# Altium PCB AD835乘法器 腐蚀电路图.PcbDoc
Units mil, origin at the board's own origin, x right, y up, seen from the top; angles counter-clockwise.
Board outline 9097 x 5458 mil, 2 copper layers (Top Layer, Bottom Layer); 108 components, 10 nets, 288 pads, 0 vias.
Unrouted connection lines stored in the file: 19.
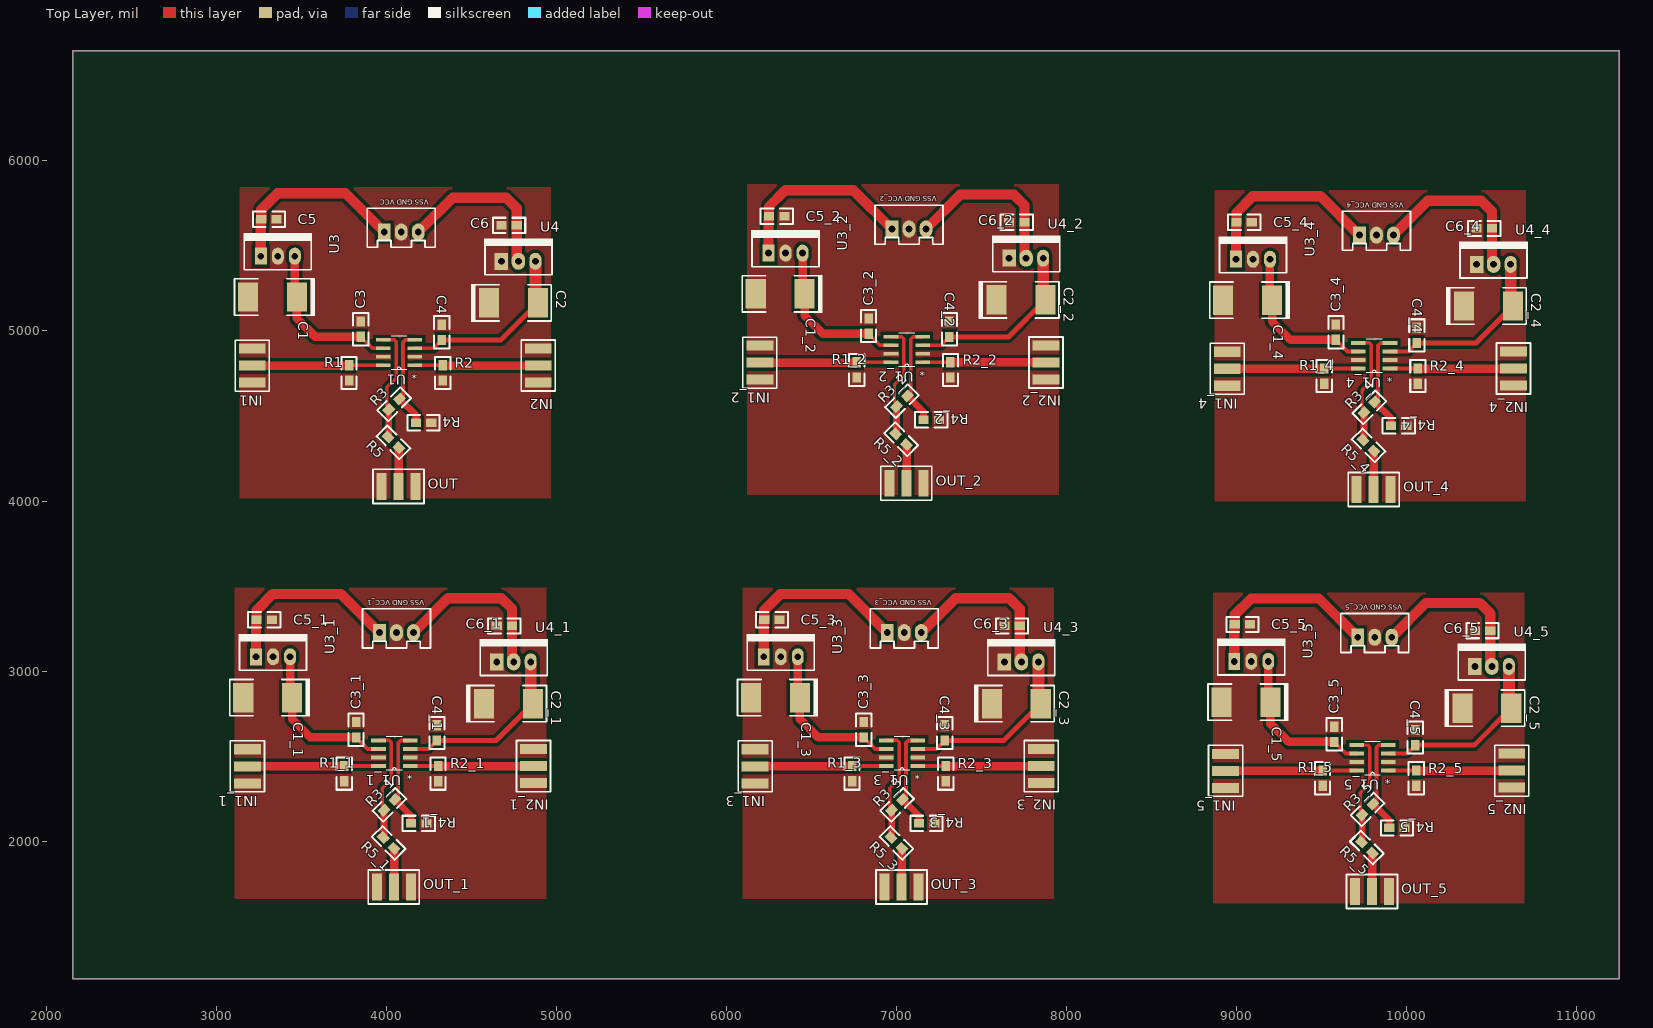
[diagram p0: Top Layer view]
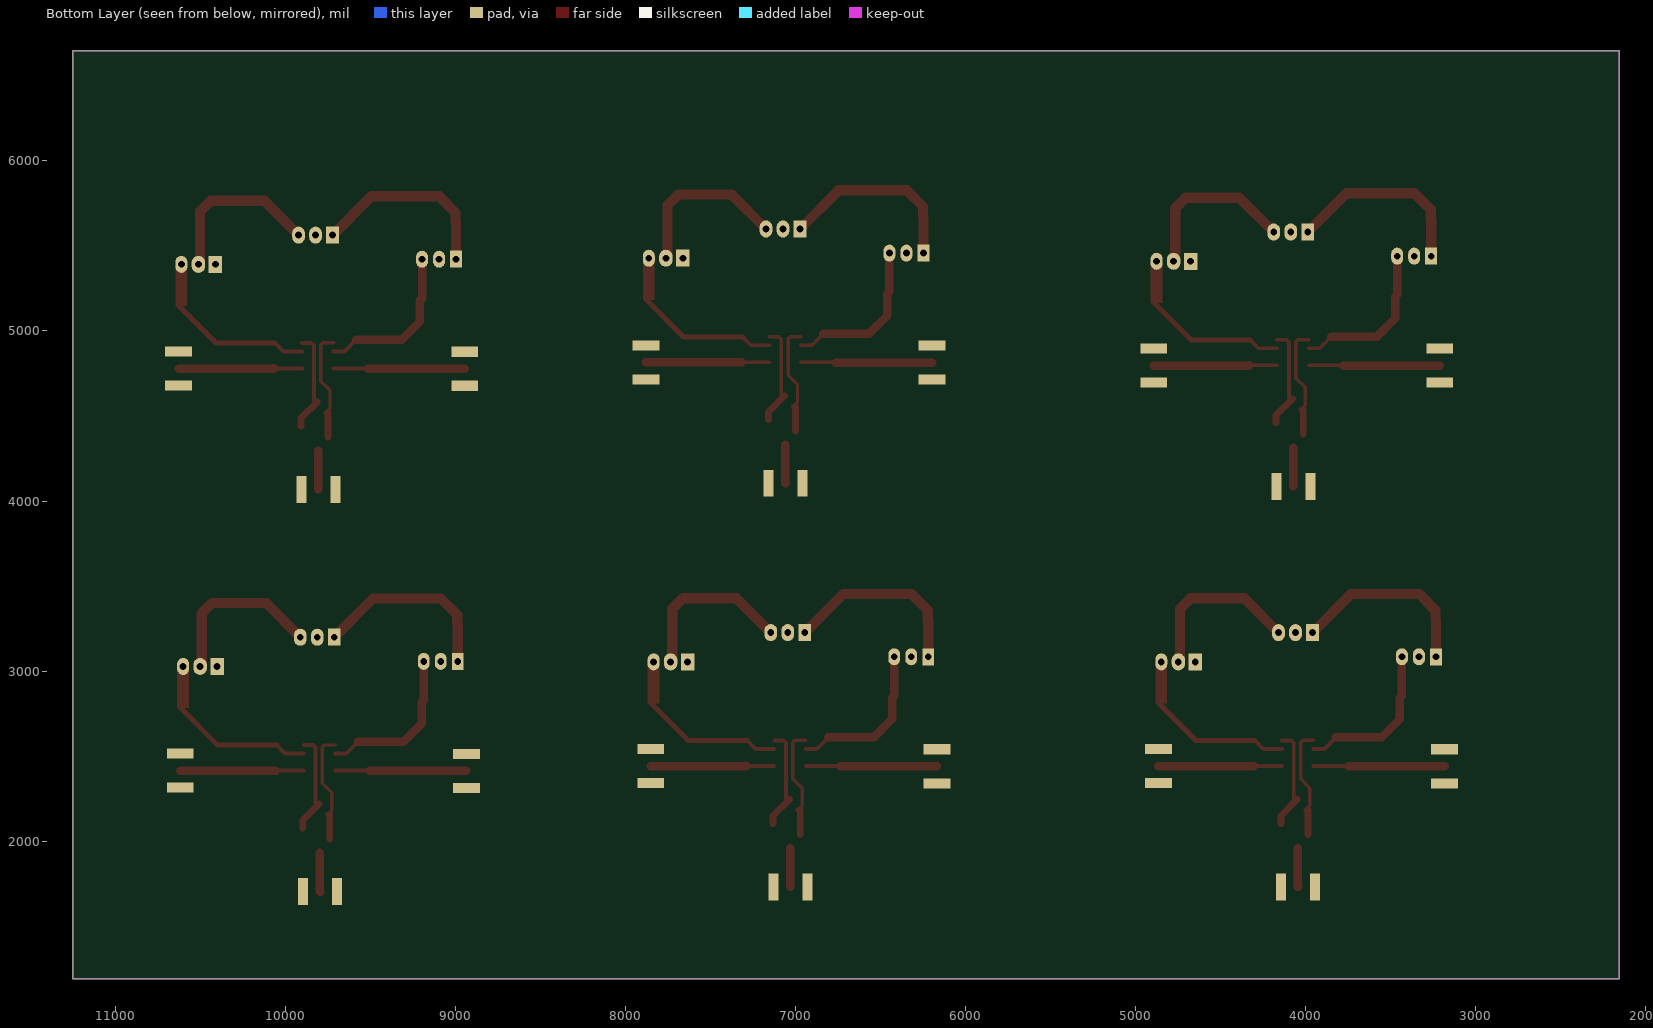
[diagram p1: Bottom Layer view, seen from below]

## Layer stack, top to bottom
Top Solder: solder mask 0.4, Solder Resist, Dk 3.5
Top Layer: signal copper 1.4
Dielectric 1: dielectric 12.6, FR-4, Dk 4.8
Bottom Layer: signal copper 1.4
Bottom Solder: solder mask 0.4, Solder Resist, Dk 3.5

## Board outline
2155,1191 2155,6649 11252,6649 11252,1191

## Design rules (kind name [scope] priority, off if disabled: settings)
Clearance [All] p1: gap=10 except(20: Arc-Fill Arc-Poly Track-Fill Track-Poly SMDPad-Fill SMDPad-Poly THPad-Fill THPad-Poly Via-Fill Via-Poly Fill-Fill Fill-Poly Poly-Poly)
PlaneClearance [All] p1: clearance=40
PolygonConnect [All] p1: connectstyle=Direct reliefconductorwidth=10 reliefentries=4 polygonreliefangle="90 Angle" airgapwidth=10
RoutingVias [All] p1: holewidth=28 width=50 viastyle="Through Hole" minholewidth=28 minwidth=50 maxholewidth=28 maxwidth=50
SolderMaskExpansion [All] p1: expansion=4
Width [All] p1: maxlimit=60 minlimit=6 preferedwidth=10
29 further rules are at their usual default settings.

## Classes and differential pairs
component class AD835乘法器: C1 C2 C3 C4 C5 C6 IN1 IN2 OUT R1 R2 R3 R4 R5 U1 U3 U4 "VSS GND VCC"

## Components (designator, comment, footprint, x,y, rotation, side; value= is the part's Value field where it differs from the comment)
C1 "4.7uf" 7343C-TYPE_D 3474,5200 r0 top
C1_1 "4.7uf" 7343C-TYPE_D 3446,2844 r0 top (schematic designator C1)
C1_2 "4.7uf" 7343C-TYPE_D 6460,5218 r0 top (schematic designator C1)
C1_3 "4.7uf" 7343C-TYPE_D 6432,2844 r0 top (schematic designator C1)
C1_4 "4.7uf" 7343C-TYPE_D 9209,5182 r0 top (schematic designator C1)
C1_5 "4.7uf" 7343C-TYPE_D 9199,2817 r0 top (schematic designator C1)
C2 "4.7uf" 7343C-TYPE_D 4603.6,5165 r180 top
C2_1 "4.7uf" 7343C-TYPE_D 4575.6,2809 r180 top (schematic designator C2)
C2_2 "4.7uf" 7343C-TYPE_D 7589.6,5183 r180 top (schematic designator C2)
C2_3 "4.7uf" 7343C-TYPE_D 7561.6,2809 r180 top (schematic designator C2)
C2_4 "4.7uf" 7343C-TYPE_D 10338.6,5147 r180 top (schematic designator C2)
C2_5 "4.7uf" 7343C-TYPE_D 10328.6,2782 r180 top (schematic designator C2)
C3 "0.01uF" 0805 3850,5056 r270 top
C3_1 "0.01uF" 0805 3822,2700 r270 top (schematic designator C3)
C3_2 "0.01uF" 0805 6836,5074 r270 top (schematic designator C3)
C3_3 "0.01uF" 0805 6808,2700 r270 top (schematic designator C3)
C3_4 "0.01uF" 0805 9585,5038 r270 top (schematic designator C3)
C3_5 "0.01uF" 0805 9575,2673 r270 top (schematic designator C3)
C4 "Cap1" 0805 4326,5037 r270 top
C4_1 "Cap1" 0805 4298,2681 r270 top (schematic designator C4)
C4_2 "Cap1" 0805 7312,5055 r270 top (schematic designator C4)
C4_3 "Cap1" 0805 7284,2681 r270 top (schematic designator C4)
C4_4 "Cap1" 0805 10061,5019 r270 top (schematic designator C4)
C4_5 "Cap1" 0805 10051,2654 r270 top (schematic designator C4)
C5 "Cap1" 0805 3355,5657 r180 top
C5_1 "Cap1" 0805 3327,3301 r180 top (schematic designator C5)
C5_2 "Cap1" 0805 6341,5675 r180 top (schematic designator C5)
C5_3 "Cap1" 0805 6313,3301 r180 top (schematic designator C5)
C5_4 "Cap1" 0805 9090,5639 r180 top (schematic designator C5)
C5_5 "Cap1" 0805 9080,3274 r180 top (schematic designator C5)
C6 "Cap1" 0805 4677,5621 r0 top
C6_1 "Cap1" 0805 4649,3265 r0 top (schematic designator C6)
C6_2 "Cap1" 0805 7663,5639 r0 top (schematic designator C6)
C6_3 "Cap1" 0805 7635,3265 r0 top (schematic designator C6)
C6_4 "Cap1" 0805 10412,5603 r0 top (schematic designator C6)
C6_5 "Cap1" 0805 10402,3238 r0 top (schematic designator C6)
IN1 "SMA-2" SMA-2 3211,4796 r270 top
IN1_1 "SMA-2" SMA-2 3183,2440 r270 top (schematic designator IN1)
IN1_2 "SMA-2" SMA-2 6197,4814 r270 top (schematic designator IN1)
IN1_3 "SMA-2" SMA-2 6169,2440 r270 top (schematic designator IN1)
IN1_4 "SMA-2" SMA-2 8946,4778 r270 top (schematic designator IN1)
IN1_5 "SMA-2" SMA-2 8936,2413 r270 top (schematic designator IN1)
IN2 "SMA-2" SMA-2 4894,4797 r90 top
IN2_1 "SMA-2" SMA-2 4866,2441 r90 top (schematic designator IN2)
IN2_2 "SMA-2" SMA-2 7880,4815 r90 top (schematic designator IN2)
IN2_3 "SMA-2" SMA-2 7852,2441 r90 top (schematic designator IN2)
IN2_4 "SMA-2" SMA-2 10629,4779 r90 top (schematic designator IN2)
IN2_5 "SMA-2" SMA-2 10619,2414 r90 top (schematic designator IN2)
OUT "SMA-2" SMA-2 4072,4086 r0 top
OUT_1 "SMA-2" SMA-2 4044,1730 r0 top (schematic designator OUT)
OUT_2 "SMA-2" SMA-2 7058,4104 r0 top (schematic designator OUT)
OUT_3 "SMA-2" SMA-2 7030,1730 r0 top (schematic designator OUT)
OUT_4 "SMA-2" SMA-2 9807,4068 r0 top (schematic designator OUT)
OUT_5 "SMA-2" SMA-2 9797,1703 r0 top (schematic designator OUT)
R1 "RES" 0805 3781,4798 r270 top
R1_1 "RES" 0805 3753,2442 r270 top (schematic designator R1)
R1_2 "RES" 0805 6767,4816 r270 top (schematic designator R1)
R1_3 "RES" 0805 6739,2442 r270 top (schematic designator R1)
R1_4 "RES" 0805 9516,4780 r270 top (schematic designator R1)
R1_5 "RES" 0805 9506,2415 r270 top (schematic designator R1)
R2 "RES" 0805 4332,4708 r90 top
R2_1 "RES" 0805 4304,2352 r90 top (schematic designator R2)
R2_2 "RES" 0805 7318,4726 r90 top (schematic designator R2)
R2_3 "RES" 0805 7290,2352 r90 top (schematic designator R2)
R2_4 "RES" 0805 10067,4690 r90 top (schematic designator R2)
R2_5 "RES" 0805 10057,2325 r90 top (schematic designator R2)
R3 "RES" 0805 4078,4601 r225 top
R3_1 "RES" 0805 4050,2245 r225 top (schematic designator R3)
R3_2 "RES" 0805 7064,4619 r225 top (schematic designator R3)
R3_3 "RES" 0805 7036,2245 r225 top (schematic designator R3)
R3_4 "RES" 0805 9813,4583 r225 top (schematic designator R3)
R3_5 "RES" 0805 9803,2218 r225 top (schematic designator R3)
R4 "RES" 0805 4264,4460 r180 top
R4_1 "RES" 0805 4236,2104 r180 top (schematic designator R4)
R4_2 "RES" 0805 7250,4478 r180 top (schematic designator R4)
R4_3 "RES" 0805 7222,2104 r180 top (schematic designator R4)
R4_4 "RES" 0805 9999,4442 r180 top (schematic designator R4)
R4_5 "RES" 0805 9989,2077 r180 top (schematic designator R4)
R5 "RES" 0805 4010,4377 r315 top
R5_1 "RES" 0805 3982,2021 r315 top (schematic designator R5)
R5_2 "RES" 0805 6996,4395 r315 top (schematic designator R5)
R5_3 "RES" 0805 6968,2021 r315 top (schematic designator R5)
R5_4 "RES" 0805 9745,4359 r315 top (schematic designator R5)
R5_5 "RES" 0805 9735,1994 r315 top (schematic designator R5)
U1 "AD835AR" R_8 4075,4873 r180 top
U1_1 "AD835AR" R_8 4047,2517 r180 top (schematic designator U1)
U1_2 "AD835AR" R_8 7061,4891 r180 top (schematic designator U1)
U1_3 "AD835AR" R_8 7033,2517 r180 top (schematic designator U1)
U1_4 "AD835AR" R_8 9810,4855 r180 top (schematic designator U1)
U1_5 "AD835AR" R_8 9800,2490 r180 top (schematic designator U1)
U3 "LM7805" TO-220#1 3262,5440 r0 top
U3_1 "LM7805" TO-220#1 3234,3084 r0 top (schematic designator U3)
U3_2 "LM7805" TO-220#1 6248,5458 r0 top (schematic designator U3)
U3_3 "LM7805" TO-220#1 6220,3084 r0 top (schematic designator U3)
U3_4 "LM7805" TO-220#1 8997,5422 r0 top (schematic designator U3)
U3_5 "LM7805" TO-220#1 8987,3057 r0 top (schematic designator U3)
U4 "LM7905" TO-220#2 4677,5410 r0 top
U4_1 "LM7905" TO-220#2 4649,3054 r0 top (schematic designator U4)
U4_2 "LM7905" TO-220#2 7663,5428 r0 top (schematic designator U4)
U4_3 "LM7905" TO-220#2 7635,3054 r0 top (schematic designator U4)
U4_4 "LM7905" TO-220#2 10412,5392 r0 top (schematic designator U4)
U4_5 "LM7905" TO-220#2 10402,3027 r0 top (schematic designator U4)
"VSS GND VCC" "XH2.54-3p" XH2.54-3p 3988,5582 r0 top (schematic designator U2)
"VSS GND VCC_1" "XH2.54-3p" XH2.54-3p 3960,3226 r0 top (schematic designator U2)
"VSS GND VCC_2" "XH2.54-3p" XH2.54-3p 6974,5600 r0 top (schematic designator U2)
"VSS GND VCC_3" "XH2.54-3p" XH2.54-3p 6946,3226 r0 top (schematic designator U2)
"VSS GND VCC_4" "XH2.54-3p" XH2.54-3p 9723,5564 r0 top (schematic designator U2)
"VSS GND VCC_5" "XH2.54-3p" XH2.54-3p 9713,3199 r0 top (schematic designator U2)

## Footprints (in the part's own frame and the unit in brackets; to place one, negate y for a bottom-side part, rotate by r counter-clockwise, add the part's x,y. Pads: shape width x height; smd on the part's side, far side on the other; paste and mask are expansions set on the pad)
0805 [mil]
  rect 60x50 smd: 1(0,0) 2(90,0)
  silkscreen extent -50,-45 140,45
7343C-TYPE_D [mm]
  rect 3x4.4 smd: 1(0,0) 2(-7.3,0)
  silkscreen extent -9.31,-2.84 2.7,2.84
R_8 [mil]
  rect 86x22 smd: 1(-93,75) 2(-93,25) 3(-93,-25) 4(-93,-75) 5(93,-75) 6(93,-25) 7(93,25) 8(93,75)
  silkscreen extent -46,-98 46,98, body extent -122,-99 122,99, height 69
SMA-2 [mm]
  rect 1.5x4 smd: 1(0,0)
  rect 1.5x4 all layers, no hole: 2(2.54,0) 3(-2.54,0)
  silkscreen extent -3.81,-2.54 3.81,2.54, body extent -3,-11.89 3,1.71, height 3.2
TO-220#1 [mil]
  rect 70x100 hole 40: 1(0,0)
  oval 70x100 hole 40: 2(100,0) 3(200,0)
  silkscreen extent -102,-80 302,135
TO-220#2 [mil]
  rect 80x100 hole 40: 1(0,0)
  oval 80x100 hole 40: 2(100,0)
  oval 70x100 hole 40: 3(200,0)
  silkscreen extent -102,-80 302,135
XH2.54-3p [mil]
  rect 75x100 hole 40: 1(0,0)
  oval 75x100 hole 40: 2(100,0) 3(200,0)
  silkscreen extent -100,-90 300,140

## Part data
C1 C1_1 C1_2 C1_3 C1_4 C1_5 C2 C2_1 C2_2 C2_3 C2_4 C2_5: library part Cap
C3 C3_1 C3_2 C3_3 C3_4 C3_5: library part Cap1
U1 U1_1 U1_2 U1_3 U1_4 U1_5: "Imported"

## Nets (pads, with @x,y where several pads share a name; then routed paths per layer and width w, separated by ;. In a path a pad name is that pad's centre, name@x,y a point inside that pad or via, vN(x,y) a via of type N, cw(c..) or ccw(c..) an arc to the next point about the centre after c; other vN are vias at no path point)
GND: "VSS GND VCC.2" C1.2 C2.1 C3.1 C4.1 C5.1 C6.1 IN1.2 IN1.3 IN2.2 IN2.3 OUT.2 OUT.3 R1.2 R2.1 R4.1 U1.2 U1.7 U3.2 U4.1
NetC1_1: C1.1 C3.2 U1.6 U3.3 | length 951.9
  Top Layer w22: C3.2 3918,4898 U1.6
  Top Layer w50: U3.3 3462,5212 C1.1 3474,5074 3582,4966 C3.2
NetC2_2: C2.2 C4.2 U1.3 U4.3 | length 833.6
  Top Layer w22: U1.3 4277,4898 C4.2
  Top Layer w30: C4.2 4673,4947 C2.2
NetC5_2: "VSS GND VCC.1" C5.2 U3.1 | length 1132.4
  Top Layer w60: U3.1 3262,5654 C5.2 3265,5714 3361,5810 3760,5810 3988,5582
NetC6_2: "VSS GND VCC.3" C6.2 U4.2 | length 1004.5
  Top Layer w60: 4188,5582 4390,5784 4705,5784 4767,5722 C6.2 4767,5420 U4.2
NetIN1_1: IN1.1 R1.1 U1.8 | length 771.8
  Top Layer w22: R1.1@3779,4796 R1.1 U1.8
  Top Layer w50: IN1.1 R1.1@3779,4796
NetIN2_1: IN2.1 R2.2 U1.1 | length 726.4
  Top Layer w22: U1.1 R2.2
  Top Layer w50: R2.2 4333,4797 IN2.1
NetOUT_1: OUT.1 R5.2 | length 228
  Top Layer w50: OUT.1 4073.64,4087.64 R5.2
NetR3_1: R3.1 R4.2 U1.4 | length 590.4
  Top Layer w22: R3.1@4090.64,4602.64 4098,4610 4098,4933 4113,4948 U1.4
  Top Layer w40: R3.1 4174,4505 R4.2
NetR3_2: R3.2 R5.1 U1.5 | length 663.5
  Top Layer w20: U1.5 4046,4948 4058,4936 4058,4723 4003,4668 4003,4563 R3.2@4027,4539
  Top Layer w30: R3.2@4019.86,4531.86 R3.2@4027,4539
  Top Layer w40: R5.1@4014.36,4394.64 R3.2
pads on no net: "VSS GND VCC_1.1" "VSS GND VCC_1.2" "VSS GND VCC_1.3" "VSS GND VCC_2.1" "VSS GND VCC_2.2" "VSS GND VCC_2.3" "VSS GND VCC_3.1" "VSS GND VCC_3.2" "VSS GND VCC_3.3" "VSS GND VCC_4.1" "VSS GND VCC_4.2" "VSS GND VCC_4.3" "VSS GND VCC_5.1" "VSS GND VCC_5.2" "VSS GND VCC_5.3" C1_1.1 C1_1.2 C1_2.1 C1_2.2 C1_3.1 C1_3.2 C1_4.1 C1_4.2 C1_5.1 C1_5.2 C2_1.1 C2_1.2 C2_2.1 C2_2.2 C2_3.1 C2_3.2 C2_4.1 C2_4.2 C2_5.1 C2_5.2 C3_1.1 C3_1.2 C3_2.1 C3_2.2 C3_3.1 C3_3.2 C3_4.1 C3_4.2 C3_5.1 C3_5.2 C4_1.1 C4_1.2 C4_2.1 C4_2.2 C4_3.1 C4_3.2 C4_4.1 C4_4.2 C4_5.1 C4_5.2 C5_1.1 C5_1.2 C5_2.1 C5_2.2 C5_3.1 C5_3.2 C5_4.1 C5_4.2 C5_5.1 C5_5.2 C6_1.1 C6_1.2 C6_2.1 C6_2.2 C6_3.1 C6_3.2 C6_4.1 C6_4.2 C6_5.1 C6_5.2 IN1_1.1 IN1_1.2 IN1_1.3 IN1_2.1 IN1_2.2 IN1_2.3 IN1_3.1 IN1_3.2 IN1_3.3 IN1_4.1 IN1_4.2 IN1_4.3 IN1_5.1 IN1_5.2 IN1_5.3 IN2_1.1 IN2_1.2 IN2_1.3 IN2_2.1 IN2_2.2 IN2_2.3 IN2_3.1 IN2_3.2 IN2_3.3 IN2_4.1 IN2_4.2 IN2_4.3 IN2_5.1 IN2_5.2 IN2_5.3 OUT_1.1 OUT_1.2 OUT_1.3 OUT_2.1 OUT_2.2 OUT_2.3 OUT_3.1 OUT_3.2 OUT_3.3 OUT_4.1 OUT_4.2 OUT_4.3 OUT_5.1 OUT_5.2 OUT_5.3 R1_1.1 R1_1.2 R1_2.1 R1_2.2 R1_3.1 R1_3.2 R1_4.1 R1_4.2 R1_5.1 R1_5.2 R2_1.1 R2_1.2 R2_2.1 R2_2.2 R2_3.1 R2_3.2 R2_4.1 R2_4.2 R2_5.1 R2_5.2 R3_1.1 R3_1.2 R3_2.1 R3_2.2 R3_3.1 R3_3.2 R3_4.1 R3_4.2 R3_5.1 R3_5.2 R4_1.1 R4_1.2 R4_2.1 R4_2.2 R4_3.1 R4_3.2 R4_4.1 R4_4.2 R4_5.1 R4_5.2 R5_1.1 R5_1.2 R5_2.1 R5_2.2 R5_3.1 R5_3.2 R5_4.1 R5_4.2 R5_5.1 R5_5.2 U1_1.1 U1_1.2 U1_1.3 U1_1.4 U1_1.5 U1_1.6 U1_1.7 U1_1.8 U1_2.1 U1_2.2 U1_2.3 U1_2.4 U1_2.5 U1_2.6 U1_2.7 U1_2.8 U1_3.1 U1_3.2 U1_3.3 U1_3.4 U1_3.5 U1_3.6 U1_3.7 U1_3.8 U1_4.1 U1_4.2 U1_4.3 U1_4.4 U1_4.5 U1_4.6 U1_4.7 U1_4.8 U1_5.1 U1_5.2 U1_5.3 U1_5.4 U1_5.5 U1_5.6 U1_5.7 U1_5.8 U3_1.1 U3_1.2 U3_1.3 U3_2.1 U3_2.2 U3_2.3 U3_3.1 U3_3.2 U3_3.3 U3_4.1 U3_4.2 U3_4.3 U3_5.1 U3_5.2 U3_5.3 U4_1.1 U4_1.2 U4_1.3 U4_2.1 U4_2.2 U4_2.3 U4_3.1 U4_3.2 U4_3.3 U4_4.1 U4_4.2 U4_4.3 U4_5.1 U4_5.2 U4_5.3
copper on no net: | length 34512.9
  Top Layer w20: 3954,2592 4018,2592 4030,2580 4030,2367 3975,2312 3975,2207 3999,2183 ; 6940,2592 7004,2592 7016,2580 7016,2367 6961,2312 6961,2207 6985,2183 ; 6968,4966 7032,4966 7044,4954 7044,4741 6989,4686 6989,4581 7013,4557 ; 9707,2565 9771,2565 9783,2553 9783,2340 9728,2285 9728,2180 9752,2156 ; 9717,4930 9781,4930 9793,4918 9793,4705 9738,4650 9738,4545 9762,4521
  Top Layer w22: 3751,2440 3753,2442 3954,2442 ; 3822,2610 3890,2542 3954,2542 ; 4062.64,2246.64 4070,2254 4070,2577 4085,2592 4140,2592 ; 4140,2442 4304,2442 ; 4140,2542 4249,2542 4298,2591 ; 6737,2440 6739,2442 6940,2442 ; 6765,4814 6767,4816 6968,4816 ; 6808,2610 6876,2542 6940,2542 ; 6836,4984 6904,4916 6968,4916 ; 7048.64,2246.64 7056,2254 7056,2577 7071,2592 7126,2592 ; 7076.64,4620.64 7084,4628 7084,4951 7099,4966 7154,4966 ; 7126,2442 7290,2442 ; 7126,2542 7235,2542 7284,2591 ; 7154,4816 7318,4816 ; 7154,4916 7263,4916 7312,4965 ; 9504,2413 9506,2415 9707,2415 ; 9514,4778 9516,4780 9717,4780 ; 9575,2583 9643,2515 9707,2515 ; 9585,4948 9653,4880 9717,4880 ; 9815.64,2219.64 9823,2227 9823,2550 9838,2565 9893,2565 ; 9825.64,4584.64 9833,4592 9833,4915 9848,4930 9903,4930 ; 9893,2415 10057,2415 ; 9893,2515 10002,2515 10051,2564 ; 9903,4780 10067,4780 ; 9903,4880 10012,4880 10061,4929
  Top Layer w30: 3991.86,2175.86 3999,2183 ; 4298,2591 4645,2591 4863,2809 ; 6977.86,2175.86 6985,2183 ; 7005.86,4549.86 7013,4557 ; 7284,2591 7631,2591 7849,2809 ; 7312,4965 7659,4965 7877,5183 ; 9744.86,2148.86 9752,2156 ; 9754.86,4513.86 9762,4521 ; 10051,2564 10398,2564 10616,2782 ; 10061,4929 10408,4929 10626,5147
  Top Layer w40: 3986.36,2038.64 3986.36,2181.36 ; 4050,2245 4146,2149 4146,2104 ; 6972.36,2038.64 6972.36,2181.36 ; 7000.36,4412.64 7000.36,4555.36 ; 7036,2245 7132,2149 7132,2104 ; 7064,4619 7160,4523 7160,4478 ; 9739.36,2011.64 9739.36,2154.36 ; 9749.36,4376.64 9749.36,4519.36 ; 9803,2218 9899,2122 9899,2077 ; 9813,4583 9909,4487 9909,4442
  Top Layer w50: 3183,2440 3751,2440 ; 3434,3084 3434,2856 3446,2844 3446,2718 3554,2610 3822,2610 ; 4044,1730 4045.64,1731.64 4045.64,1957.36 ; 4304,2442 4305,2441 4866,2441 ; 6169,2440 6737,2440 ; 6197,4814 6765,4814 ; 6420,3084 6420,2856 6432,2844 6432,2718 6540,2610 6808,2610 ; 6448,5458 6448,5230 6460,5218 6460,5092 6568,4984 6836,4984 ; 7030,1730 7031.64,1731.64 7031.64,1957.36 ; 7058,4104 7059.64,4105.64 7059.64,4331.36 ; 7290,2442 7291,2441 7852,2441 ; 7318,4816 7319,4815 7880,4815 ; 8936,2413 9504,2413 ; 8946,4778 9514,4778 ; 9187,3057 9187,2829 9199,2817 9199,2691 9307,2583 9575,2583 ; 9197,5422 9197,5194 9209,5182 9209,5056 9317,4948 9585,4948 ; 9797,1703 9798.64,1704.64 9798.64,1930.36 ; 9807,4068 9808.64,4069.64 9808.64,4295.36 ; 10057,2415 10058,2414 10619,2414 ; 10067,4780 10068,4779 10629,4779
  Top Layer w60: 3234,3084 3234,3298 3237,3301 3237,3358 3333,3454 3732,3454 3960,3226 ; 4160,3226 4362,3428 4677,3428 4739,3366 4739,3265 4739,3064 4749,3054 ; 6220,3084 6220,3298 6223,3301 6223,3358 6319,3454 6718,3454 6946,3226 ; 6248,5458 6248,5672 6251,5675 6251,5732 6347,5828 6746,5828 6974,5600 ; 7146,3226 7348,3428 7663,3428 7725,3366 7725,3265 7725,3064 7735,3054 ; 7174,5600 7376,5802 7691,5802 7753,5740 7753,5639 7753,5438 7763,5428 ; 8987,3057 8987,3271 8990,3274 8990,3331 9086,3427 9485,3427 9713,3199 ; 8997,5422 8997,5636 9000,5639 9000,5696 9096,5792 9495,5792 9723,5564 ; 9913,3199 10115,3401 10430,3401 10492,3339 10492,3238 10492,3037 10502,3027 ; 9923,5564 10125,5766 10440,5766 10502,5704 10502,5603 10502,5402 10512,5392

## Polygon pours and split planes (outlines as drawn)
no net on Top Layer "Top Layer-No Net" (solid, pour order 18): 8842,3487 8837,3482 8837,1609 10718,1609 10718,3487
no net on Top Layer "Top Layer-No Net" (solid, pour order 16): 8852,5852 8847,5847 8847,3974 10728,3974 10728,5852
no net on Top Layer "Top Layer-No Net" (solid, pour order 14): 6075,3514 6070,3509 6070,1636 7951,1636 7951,3514
no net on Top Layer "Top Layer-No Net" (solid, pour order 12): 6103,5888 6098,5883 6098,4010 7979,4010 7979,5888
no net on Top Layer "Top Layer-No Net" (solid, pour order 10): 3089,3514 3084,3509 3084,1636 4965,1636 4965,3514
GND on Top Layer "Top Layer-No Net" (solid, pour order 8): 3117,5870 3112,5865 3112,3992 4993,3992 4993,5870

## Keep-outs
Keep-Out Layer:
  the board outline again, w10

## Other copper
Top Layer:
  rectangle: 10568,2782 10637,3025
  rectangle: 10578,5147 10647,5390
  rectangle: 7801,2809 7870,3052
  rectangle: 7829,5183 7898,5426
  rectangle: 4815,2809 4884,3052
  rectangle net NetC2_2: 4843,5165 4912,5408

## Text inside footprints (layer, text, board x,y; h text height)
U1: Top Overlay "*" at 4183,4766 h50 r180; Mechanical 13 "*" at 4183,4766 h50 r180
U1_1: Top Overlay "*" at 4155,2410 h50 r180; Mechanical 13 "*" at 4155,2410 h50 r180
U1_2: Top Overlay "*" at 7169,4784 h50 r180; Mechanical 13 "*" at 7169,4784 h50 r180
U1_3: Top Overlay "*" at 7141,2410 h50 r180; Mechanical 13 "*" at 7141,2410 h50 r180
U1_4: Top Overlay "*" at 9918,4748 h50 r180; Mechanical 13 "*" at 9918,4748 h50 r180
U1_5: Top Overlay "*" at 9908,2383 h50 r180; Mechanical 13 "*" at 9908,2383 h50 r180